# Altium PCB servo_pwr.PcbDoc (part 1 of 2)
Units mm, origin at the board's own origin, x right, y up, seen from the top; angles counter-clockwise.
Board outline 96 x 219 mm, 2 copper layers (Top Layer, Bottom Layer), stack 1.57 mm thick; 132 components, 82 nets, 367 pads, 95 vias.
Unrouted connection lines stored in the file: 2.
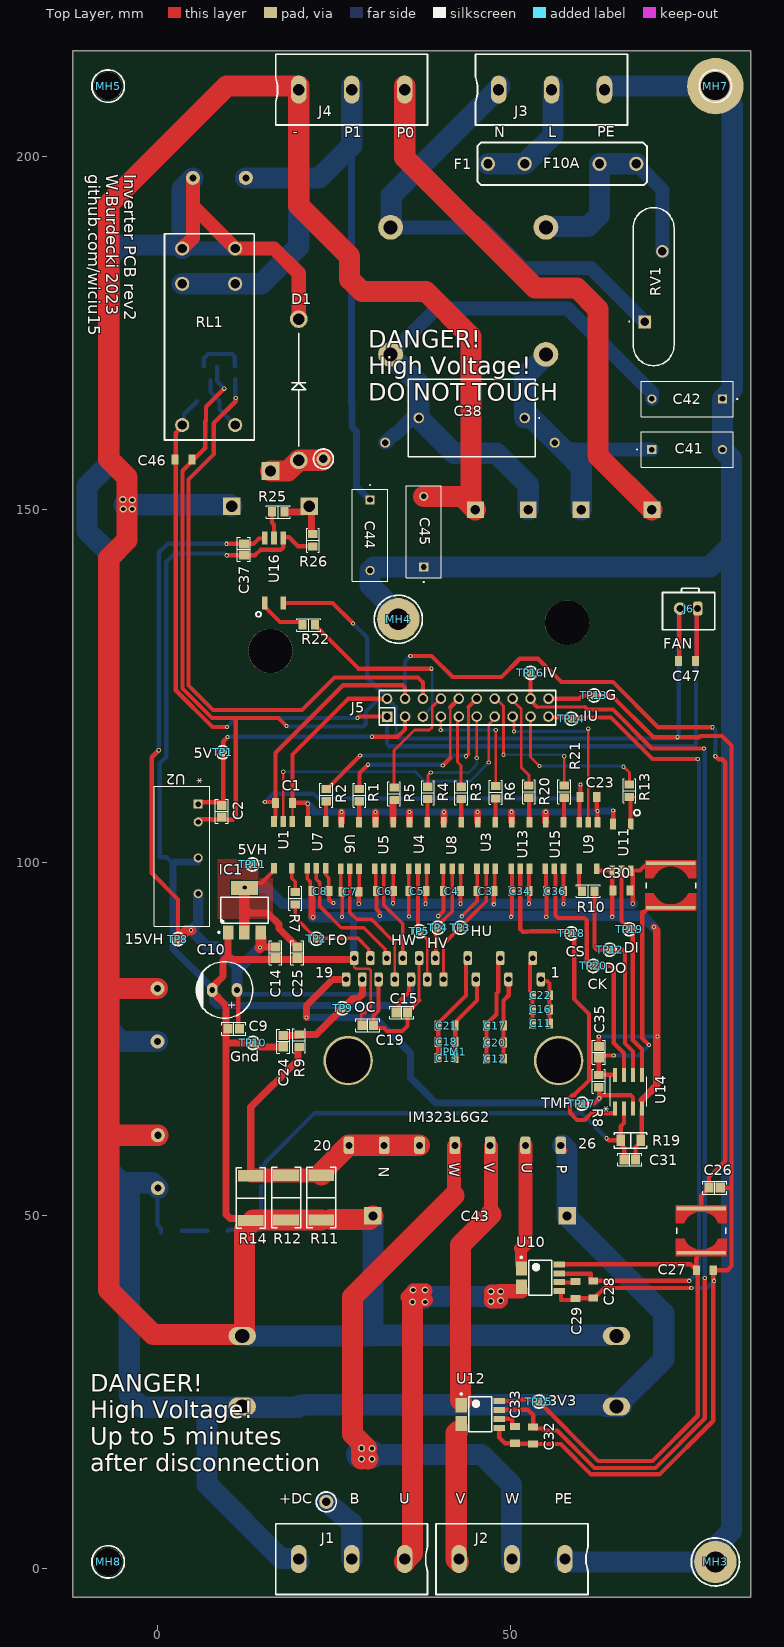
[diagram p0: Top Layer view]
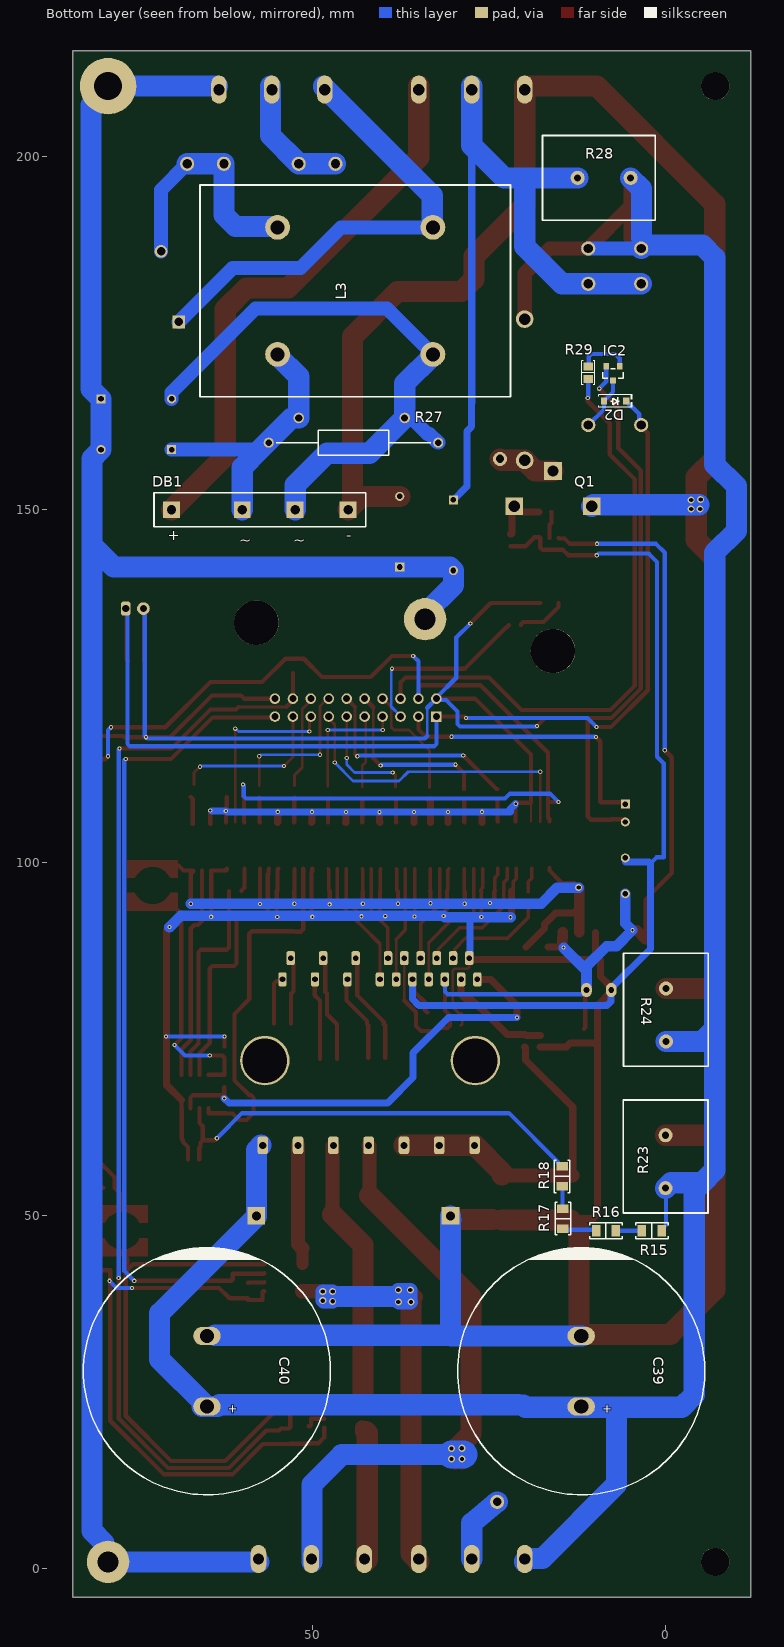
[diagram p1: Bottom Layer view, seen from below]
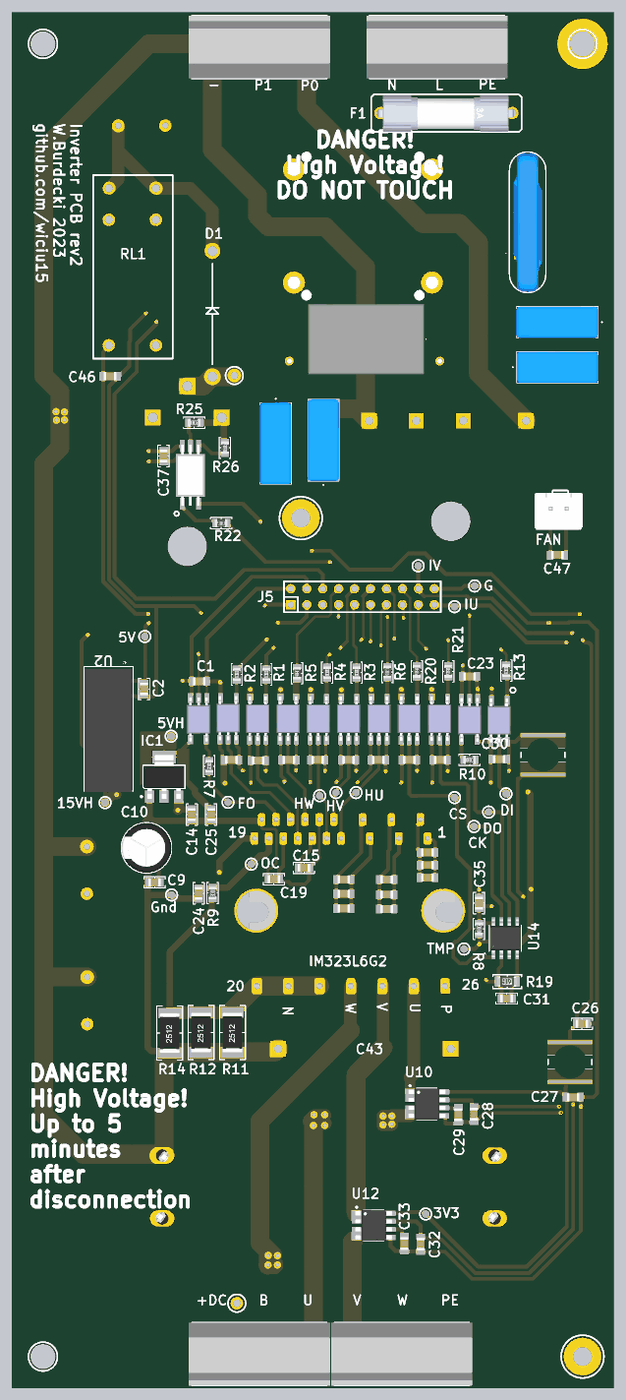
[diagram p3: 3D render of the assembled board from above, using the file's embedded part models]
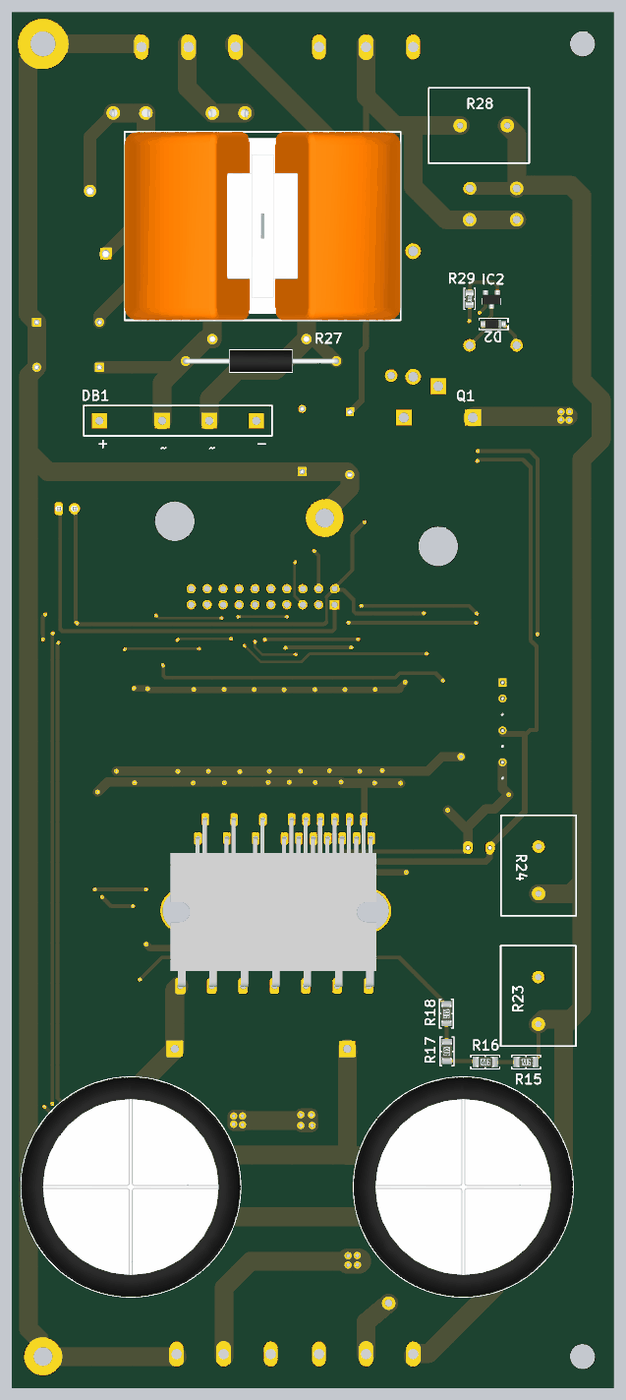
[diagram p4: 3D render of the assembled board from below, using the file's embedded part models]

## Layer stack, top to bottom
Top Solder: solder mask 0.0127, Solder Resist, Dk 3.8
Top Layer: signal copper 0.035
Dielectric: core 1.5, FR-4, Dk 4.5
Bottom Layer: signal copper 0.035
Bottom Solder: solder mask 0.0127, Solder Resist, Dk 3.8

## Board outline
-12,-4 84,-4 84,215 -12,215

## Design rules (kind name [scope] priority, off if disabled: settings)
BoardOutlineClearance [All] p1: gap=0.2 ignorepadtopadclearanceinfootprint=FALSE
Clearance [InNetClass('Cold') vs Not InNetClass('Cold')] p1: gap=3.5 ignorepadtopadclearanceinfootprint=FALSE except(2.5: Arc-Arc Arc-Track Arc-SMDPad Arc-THPad Arc-Via Arc-Fill Arc-Poly Arc-Region Arc-Text Arc-Hole Track-Track Track-SMDPad Track-THPad Track-Via Track-Fill Track-Poly Track-Region Track-Text Track-Hole)
Clearance Clearance_1 [InNetClass('HV') vs Not InNetClass('HV')] p2: gap=2.5 ignorepadtopadclearanceinfootprint=TRUE except(2: Arc-Arc Arc-Track Track-Track)
Clearance Clearance_2 [All] p3: gap=0.18 ignorepadtopadclearanceinfootprint=FALSE
ComponentClearance [All] p1: gap=0.127 collisioncheckmode=3 verticalgap=0.127 showdistances=TRUE
DiffPairsRouting [All] p1: maxlimit=0.254 minlimit=0.127 mostfreqgap=0.127 toplayer_minwidth=0.127 toplayer_maxwidth=25.4 toplayer_prefwidth=0.127 bottomlayer_minwidth=0.127 bottomlayer_maxwidth=25.4 bottomlayer_prefwidth=0.127 maxuncoupledlength=12.7
Height [All] p1: minheight=0 maxheight=1816.048 prefheight=12.7
HoleSize [All] p1: absolutevalues=TRUE maxlimit=6.3 minlimit=0.3 maxpercent=80.000 minpercent=20.000
HoleToHoleClearance [All] p1: gap=0.25 allowstackedmicrovias=FALSE
MinimumAnnularRing [All] p1: minimumring=0.076
MinimumSolderMaskSliver [All] p1: minsoldermaskwidth=0
PlaneClearance [All] p1: clearance=0.127
PlaneConnect PlaneConnectPowerPads [InPadClass('PowerPads')] p1: planeconnectstyle=Direct reliefexpansion=0.508 reliefentries=4 reliefconductorwidth=0.254 reliefairgap=0.254
PlaneConnect [All] p2: pad.planeconnectstyle=Relief pad.reliefexpansion=0.3 pad.reliefentries=4 pad.reliefconductorwidth=0.127 pad.reliefairgap=0.127 via.planeconnectstyle=Direct via.reliefexpansion=0.3 via.reliefentries=4 via.reliefconductorwidth=0.127 via.reliefairgap=0.127
PolygonConnect PolygonConnectPowerPads [All vs (InPadClass('PowerPads'))] p1: connectstyle=Direct reliefconductorwidth=0.254 reliefentries=4 polygonreliefangle="90 Angle" airgapwidth=0.254
PolygonConnect [All] p2: thpad.connectstyle=Relief thpad.reliefconductorwidth=0.127 thpad.reliefentries=4 thpad.polygonreliefangle="90 Angle" thpad.airgapwidth=0.127 smdpad.connectstyle=Relief smdpad.reliefconductorwidth=0.127 smdpad.reliefentries=4 smdpad.polygonreliefangle="90 Angle" smdpad.airgapwidth=0.127 via.connectstyle=Direct via.reliefconductorwidth=0.127 via.reliefentries=4 via.polygonreliefangle="90 Angle" via.airgapwidth=0.127
RoutingVias [All] p1: holewidth=0.3 width=0.6 viastyle="Through Hole" minholewidth=0.3 minwidth=0.6 maxholewidth=0.6 maxwidth=6.6
SilkToSilkClearance [All] p1: silktosilkclearance=0
SilkToSolderMaskClearance [IsPad] p1: minsilkscreentomaskgap=0.127 clearancetoexposedcopper=TRUE
SolderMaskExpansion [All] p1: expansion=0.075 istentingtop=FALSE
Width [All] p1: maxlimit=25.4 minlimit=0.127 preferedwidth=0.127 minimp=50.000000 maximp=50.000000 favimp=50.000000
20 further rules are at their usual default settings.

## Classes and differential pairs
net class HV: +Ug AC-L AC-N B- NetC38_1 NetC38_2 NetIPM1_24 NetIPM1_25 P0 P1 U_phase V_phase W_phase
net class Cold: +3V3 +5 +24 ADC_CLK ADC_CS ADC_MISO ADC_MOSI BRAKE EARTH GND HinU HinV HinW I_U I_V IGBT_flt LinU LinV LinW NetC27_2 NetC29_2 NetC33_2 NetD2_1 NetIC2_1 NetR1_2 NetR2_2 NetR3_2 NetR4_2 NetR5_2 NetR6_2 NetR13_2 NetR20_2 NetR21_2 NetR22_2 Softstart
component class servo_pwr: J1 J2 J3 J4 J5 J6 MH3 MH4 MH5 MH7 MH8
component class igbt_output: C1 C2 C3 C4 C5 C6 C7 C8 C9 C10 C11 C12 C13 C14 C15 C16 C17 C18 C19 C20 C21 C22 C23 C24 C25 C26 C27 C28 C29 C30 C31 C32 C33 C34 C35 C36 IC1 IPM1 R1 R2 R3 R4 R5 R6 R7 R8 R9 R10 R11 R12 R13 R14 R15 R16 R17 R18 R19 R20 R21 TP1 TP2 TP3 TP4 TP5 TP8 TP9 TP10 TP11 TP12 TP13 TP14 TP15 TP16 TP17 TP18 TP19 TP20 U1 U2 U3 U4 U5 U6 U7 U8 U9 U10 U11 U12 U13 U14 U15
component class DClink: C37 C38 C39 C40 C41 C42 C43 C44 C45 D1 D2 DB1 F1 IC2 L3 Q1 R22 R23 R24 R25 R26 R27 R28 R29 RL1 RV1 U16

## Components (designator, comment, footprint, x,y, rotation, side; value= is the part's Value field where it differs from the comment)
C1 "2.2 µF" "0805 wide" 19.1,108.5 r180 top
C2 "22 µF" "CAP 0805_2012" 9.1,107.3 r90 top
C3 "2.2 µF" "0805 wide" 45.25,96 r0 top
C4 "2.2 µF" "0805 wide" 40.5,96 r0 top
C5 "2.2 µF" "0805 wide" 35.6,96 r0 top
C6 "2.2 µF" "0805 wide" 31,96 r0 top
C7 "2.2 µF" "0805 wide" 26.1,95.9 r0 top
C8 "2.2 µF" "0805 wide" 21.85,96 r0 top
C9 "22 µF" "CAP 0805_2012" 10.8,76.5 r0 top
C10 "100 µF" "CAP AL TH D8 L3.5 H12.5" 9.5,82 r180 top locked
C11 "2.2 µF" "0805 wide" 53.1,77.25 r0 top
C12 "2.2 µF" "0805 wide" 46.6,72.25 r0 top
C13 "2.2 µF" "0805 wide" 39.75,72.35 r0 top
C14 "2.2 µF" "CAP 0805_2012" 16.7,87.3 r90 top
C15 "2.2 µF" "CAP 0805_2012" 34.6,78.8 r0 top
C16 "2.2 µF" "0805 wide" 53.1,79.25 r0 top
C17 "2.2 µF" "0805 wide" 46.6,76.95 r0 top
C18 "2.2 µF" "0805 wide" 39.75,74.65 r0 top
C19 "2.2 µF" "CAP 0805_2012" 29.8,77 r0 top
C20 "2.2 µF" "0805 wide" 46.6,74.55 r0 top
C21 "2.2 µF" "0805 wide" 39.75,76.95 r0 top
C22 "2.2 µF" "0805 wide" 53.1,81.25 r0 top
C23 "2.2 µF" "0805 wide" 62.2,109.3 r180 top
C24 "10000 pF" "CAP 0805_2012" 17.8,74.75 r90 top
C25 "2.2 µF" "CAP 0805_2012" 19.8,87.3 r90 top
C26 "22 µF" "CAP 0805_2012" 78.9,54 r180 top
C27 "22 µF" "0805 wide" 78.7,42.3 r180 top
C28 "4700 pF" "0805 wide" 61.7,38.4 r90 top
C29 "0.1 µF" "0805 wide" 59.2,38.3 r90 top
C30 "2.2 µF" "0805 wide" 64.5,96.1 r0 top
C31 "1000 pF" "CAP 0805_2012" 66.9,58 r180 top
C32 "4700 pF" "0805 wide" 53.2,17.7 r90 top
C33 "0.1 µF" "0805 wide" 50.6,17.8 r90 top
C34 "2.2 µF" "0805 wide" 50.2,96 r0 top
C35 "22 µF" "CAP 0805_2012" 62.5,73.2 r270 top
C36 "2.2 µF" "0805 wide" 55.1,96 r0 top
C37 "2.2 µF" "CAP 0805_2012" 12.225,144.375 r90 top
C38 "470n X2 275V" R46KI347050M1K 52,163 r180 top
C39 "470µF" "CAP TH ALUM ELEC D35.00mm S10.00mm H47.00mm" 12,28 r270 bottom locked
C40 "470µF" "CAP TH ALUM ELEC D35.00mm S10.00mm H47.00mm" 65,28 r270 bottom locked
C41 "4n7" B32021_(13_x_5) 70,158.52 r0 top
C42 "4n7" B32021_(13_x_5) 80,165.698 r180 top
C43 "3.3u/600V" C4AQHBU4330P1WJ 30.5,50 r0 top
C44 "4n7" B32021_(13_x_5) 30.1,151.4 r270 top
C45 "4n7" B32021_(13_x_5) 37.7,141.9 r90 top
C46 "Comment" "0805 wide" 2.5,157.1 r0 top
C47 "Comment" "0805 wide" 73.8,128.6 r0 top
D1 "10A6" 10A6 20,157 r90 top
D2 "1N4148W-7-F" SOD-123 7.2,165.4 r180 bottom
DB1 "Component_1" GBJ2506 70,150 r180 bottom locked
F1 "Fuse" FUSE 46.8,199 r0 top
IC1 "LD1117S50TR" "ST SOT-223" 12.3,93.3 r90 top
IC2 "2N7002E-7-F" "DIODES SOT-23-3" 7.5,169.3 r270 bottom
IPM1 "IM323L6G2" IM323L6G2 54.3,83.5 r270 top locked
J1 "DG128-7.5-03P-14" DG128-7.5-03P-14 16.5,1.4 r0 top
J2 "DG128-7.5-03P-14" DG128-7.5-03P-14 39.2,1.4 r0 top
J3 "DG128-7.5-03P-14" DG128-7.5-03P-14 66.8,209.5 r180 top
J4 "DG128-7.5-03P-14" DG128-7.5-03P-14 38.5,209.5 r180 top
J5 "goldpin" "goldpin 2x10" 32.51,120.71 r90 top
J6 "FAN" "JST XH 2pin" 76.5,136 r270 top
L3 "SC-18-25J" SC18-25J 33,190 r0 bottom
MH3 "Mountinghole_M2,5" "Mountinghole M2,5" 79,1 r0 top
MH4 "Mountinghole_M2,5" "Mountinghole M2,5" 34.1,134.5 r0 top
MH5 "Mountinghole_M2,5_nonplated" "Mountinghole M2,5 non plated"#1 -7,210 r0 top
MH7 "Mountinghole_M2,5_nonplated" "Mountinghole M2,5 non plated"#2 79,210 r0 top
MH8 "Mountinghole_M2,5_nonplated" "Mountinghole M2,5 non plated"#1 -7,1 r0 top
Q1 "STGW30NC60KD" STGW30NC60KD 16,150.5 r180 bottom locked
R1 "470 Ohms" "RES 0805_2012" 28.6,109.6 r270 top
R2 "470 Ohms" "RES 0805_2012" 23.9,109.6 r270 top
R3 "470 Ohms" "RES 0805_2012" 43,109.9 r270 top
R4 "470 Ohms" "RES 0805_2012" 38.3,109.9 r270 top
R5 "470 Ohms" "RES 0805_2012" 33.5,109.8 r270 top
R6 "470 Ohms" "RES 0805_2012" 47.9,110 r270 top
R7 "1 kOhms" "RES 0805_2012" 19.5,95 r270 top
R8 "22 kOhms" "RES 0805_2012" 62.5,69.1 r90 top
R9 "47 Ohms" "RES 0805_2012" 20.05,74.8 r270 top
R10 "1 kOhms" "RES 0805_2012" 61,96 r0 top
R11 "150 mOhms" "RES 2512_6432" 23.2,52.6 r90 top
R12 "150 mOhms" "RES 2512_6432" 18.2,52.6 r90 top
R13 "470 Ohms" "RES 0805_2012" 66.825,110.225 r270 top
R14 "150 mOhms" "RES 2512_6432" 13.2,52.525 r90 top
R15 "100 kOhms" "RES 1206_3216" 2,47.9 r180 bottom
R16 "100 kOhms" "RES 1206_3216" 8.5,47.9 r180 bottom
R17 "100 kOhms" "RES 1206_3216" 14.6,49.6 r270 bottom
R18 "100 kOhms" "RES 1206_3216" 14.7,55.6 r270 bottom
R19 "4.7 kOhms" "RES 1206_3216" 67,60.7 r180 top
R20 "470 Ohms" "RES 0805_2012" 52.6,110.1 r270 top
R21 "470 Ohms" "RES 0805_2012" 57.6,110.1 r270 top
R22 "470 Ohms" "RES 0805_2012" 21.4,133.7 r180 top
R23 "PRM05WJP333" prmaawjw470b00 0.05,61.425 r270 bottom
R24 "PRM05WJP333" prmaawjw470b00 0,82.2 r270 bottom
R25 "47 Ohms" "RES 0805_2012" 17.1,149.7 r0 top
R26 "10 kOhms" "RES 0805_2012" 22,145.7 r90 top
R27 "1M" RESAD2400W75L1000D350 32.25,159.5 r0 bottom
R28 "PRMAAWJW470B00" prmaawjw470b00 12.5,197 r180 bottom
R29 "470 Ohms" "RES 0805_2012" 11,169.4 r90 bottom
RL1 "G2R-1A-E" G2R-1A-E 11,162 r90 top
RV1 "SIOV-S20K275" B72220Q0271K101 69,176.6 r90 top
TP1 "5V" Testpoint1,2mm 9.225,115.65 r0 top
TP2 "FO" Testpoint1,2mm 22.5,89.25 r0 top
TP3 "HU" Testpoint1,2mm 42.9,90.8 r0 top
TP4 "HV" Testpoint1,2mm 39.7,90.8 r0 top
TP5 "HW" Testpoint1,2mm 37.1,90.3 r0 top
TP8 "15VH" Testpoint1,2mm 2.9,89.2 r0 top
TP9 "OC" Testpoint1,2mm 26.2,79.4 r90 top
TP10 "Gnd" Testpoint1,2mm 13.5,74.5 r90 top
TP11 "5VH" Testpoint1,2mm 13.425,99.775 r90 top
TP12 "DO" Testpoint1,2mm 64.037,87.7 r90 top
TP13 "G" Testpoint1,2mm 61.8,123.7 r90 top
TP14 "IU" Testpoint1,2mm 58.6,120.4 r90 top
TP15 "3V3" Testpoint1,2mm 54,23.7 r90 top
TP16 "IV" Testpoint1,2mm 52.8,126.9 r90 top
TP17 "TMP" Testpoint1,2mm 60.1,65.9 r90 top
TP18 "CS" Testpoint1,2mm 58.6,90 r90 top
TP19 "DI" Testpoint1,2mm 66.8,90.6 r90 top
TP20 "CK" Testpoint1,2mm 61.7,85.4 r90 top
U1 "TLP2345" TLP2345 16.5,99.25 r90 top
U2 "TBA 2-0513" "TBA 2_SINGLE_TRP" 5.75,108.315 r270 top
U3 "TLP2345" TLP2345 47.844,105.75 r270 top
U4 "TLP2345" TLP2345 38.19,105.75 r270 top
U5 "TLP2345" TLP2345 33.363,105.75 r270 top
U6 "TLP2345" TLP2345 28.535,105.75 r270 top
U7 "TLP2345" TLP2345 23.8,105.85 r270 top
U8 "TLP2345" TLP2345 43.017,105.75 r270 top
U9 "TLP2345" TLP2345 59.7,99.15 r90 top
U10 "LEM GO10SME/SP3" TSOP127P600X160-8N 54.2,41.243 r0 top
U11 "TLP2345" TLP2345 67,105.5 r270 top
U12 "LEM GO10SME/SP3" TSOP127P600X160-8N 45.7,21.9 r0 top
U13 "TLP2345" TLP2345 52.672,105.75 r270 top
U14 "MCP3002-I/SN" SOIC8-N_MC_MCH 66.7,67.6 r90 top
U15 "TLP2345" TLP2345 57.5,105.75 r270 top
U16 "TLP701" TLP701 15.2,136.8 r90 top

## Footprints (in the part's own frame and the unit in brackets; to place one, negate y for a bottom-side part, rotate by r counter-clockwise, add the part's x,y. Pads: shape width x height; smd on the part's side, far side on the other; paste and mask are expansions set on the pad)
10A6 [mm]
  round 2.5 hole 1.6: A(0,0) K(20,0)
  silkscreen extent 2,-1 18,1
"0805 wide" [mm]
  rect 1x1.4 smd: 1(0,0) 2(2.4,0)
  body extent 0.2,-0.62 2.2,0.65, height 1.34
B32021_(13_x_5) [mm]
  rect 1.3x1.3 hole 0.8: 1(0,0)
  round 1.3 hole 0.8: 2(10,0)
  silkscreen extent -2.15,-2.5 11.5,2.5, body extent -1.49,-2.5 11.51,2.5, height 10.79
B72220Q0271K101 [mm]
  rect 1.8x1.8 hole 1.2: 1(0,0)
  round 1.8 hole 1.2: 2(10,-2.5)
  silkscreen extent -6.2,-4.15 16.2,2.25, body extent -6.05,-3.57 15.95,1.02, height 26
C4AQHBU4330P1WJ [mm]
  rect 2.5x2.5 hole 1.3: 1(0,0) 2(27.5,0)
  body extent -2,-5.5 29.5,5.5, height 20
"CAP 0805_2012" [mm] "Chip Capacitor, 2-Leads, Body 2.00x1.20mm, IPC Medium Density"
  rect 1.3x1.4 smd: 1(-0.8,0) 2(0.8,0)
  silkscreen extent -1.7,-0.9 1.7,0.9, body extent -1,-0.64 1,0.64, height 1.26
"CAP AL TH D8 L3.5 H12.5" [mm] "8MM Diameter, 3.5MM Lead Spacing Aluminium Capacitor"
  oval 1.5x2 hole 0.8: 1(-1.75,0) 2(1.75,0)
  silkscreen extent -4,-4 4,4, body extent -4,-4 4,4, height 11.5
"CAP TH ALUM ELEC D35.00mm S10.00mm H47.00mm" [mm] "35mm Diameter 10mm Lead Spacing Aluminum Electrolytic Capacitors Radial, Can , Snap-In"
  oval 2.6x3.9 hole 2: 1(5,0) 2(-5,0)
  silkscreen extent -17.5,-17.5 17.5,17.5, body extent -17.51,-17.5 17.5,17.5, height 47
DG128-7.5-03P-14 [mm]
  oval 2.2x4 hole 1.6: 1(3.5,0) 2(11,0) 3(18.5,0)
  silkscreen extent 0.25,-5 21.75,5, body extent -0.25,-5.02 22.25,5, height 13.96
"DIODES SOT-23-3" [mm] "SOT23, 3-Leads, Body 2.90x2.40mm, Pitch 0.95mm, IPC Medium Density"
  rect 0.9x0.8 smd: 1(-1,0.95) 2(-1,-0.95) 3(1,0)
  silkscreen extent -0.7,-1.45 0.7,1.45, body extent -1.41,-1.45 1.41,1.45, height 1.5
FUSE [mm]
  round 2 hole 1.3: 1(0,0) 1(5.2,0) 2(15.8,0) 2(21,0)
  silkscreen extent -1.5,-3 22.5,3, body extent -0.4,-3 21.2,2.8, height 8.35
G2R-1A-E [mm]
  round 2 hole 1.3: 1(0,0) 2(0,7.5) 3(20,0) 3(20,7.5) 4(25,0) 4(25,7.5)
  silkscreen extent -2.1,-2.7 27.1,10, body extent -2.1,-2.7 27.1,10, height 26
GBJ2506 [mm]
  rect 2.4x2.4 hole 1.3: 1(0,0) 2(10,0) 3(17.5,0) 4(25,0)
  round 6.3 hole 6.3 unplated: ""(12,-16)
  silkscreen extent -2.5,-2.4 27.5,2.4, body extent -3,-25 28,-3.7, height 9.5
"goldpin 2x10" [mm]
  rect 1.5x1.5 hole 1: 1(0,0)
  round 1.5 hole 1: 2(0,-2.54) 3(0,-5.08) 4(0,-7.62) 5(0,-10.16) 6(0,-12.7) 7(0,-15.24) 8(0,-17.78) 9(0,-20.32) 10(0,-22.86) 11(2.54,-22.86) 12(2.54,-20.32) 13(2.54,-17.78) 14(2.54,-15.24) 15(2.54,-12.7) 16(2.54,-10.16) 17(2.54,-7.62) 18(2.54,-5.08) 19(2.54,-2.54) 20(2.54,0)
  silkscreen extent -1.2,-23.9 3.7,1.1
IM323L6G2 [mm]
  rrect50% 2x1.2 hole 0.8: 1(0,0) 2(-3,-1.15) 3(0,-4.6) 4(-3,-5.75) 5(0,-9.2) 6(-3,-10.35) 7(0,-13.8) 8(-3,-14.95) 9(0,-16.1) 10(-3,-17.25) 11(0,-18.4) 12(-3,-19.55) 13(0,-20.7) 14(-3,-21.85) 15(0,-23) 16(-3,-24.15) 17(0,-25.3) 18(-3,-26.45) 19(0,-27.6)
  rrect50% 2.5x1.5 hole 1: 20(23.5,-27.2) 21(23.5,-22.2) 22(23.5,-17.2) 23(23.5,-12.2) 24(23.5,-7.2) 25(23.5,-2.2) 26(23.5,2.8)
  round 7 hole 6.3 unplated: ""(11.5,2.5) ""(11.5,-27.3)
  body extent -3.17,-28.43 23.63,4.37, height 3.68
"JST XH 2pin" [mm]
  rrect50% 2x1.3 hole 1: 1(0,0)
  round 1.8 hole 1: 2(0,-2.5)
  silkscreen extent -2.9,-5 3,2.4, body extent -2.49,-4.91 3.35,2.31, height 7.21
"Mountinghole M2,5" [mm]
  round 6 hole 3: 1(0,0)
  silkscreen extent -3.4,-3.4 3.4,3.4
"Mountinghole M2,5 non plated"#1 [mm]
  round 4 hole 4 unplated: 1(0,0)
  silkscreen extent -2.3,-2.3 2.3,2.3
"Mountinghole M2,5 non plated"#2 [mm]
  round 8 hole 4: 1(0,0)
  silkscreen extent -2.3,-2.3 2.3,2.3
prmaawjw470b00 [mm]
  round 2 hole 1: 1(0,0) 2(7.5,0)
  silkscreen extent -5,-6 11,6, body extent -5,-6 11,6, height 35
R46KI347050M1K [mm]
  round 1.5 hole 1: 1(0,0) 2(15,0)
  silkscreen extent -2.1,-5.5 16.5,5.5, body extent -1.75,-5.61 16.75,5.6, height 19.01
"RES 0805_2012" [mm] "Chip Resistor, 2-Leads, Body 2.00x1.25mm, IPC Medium Density"
  rect 1.15x1.35 smd: 1(-0.875,0) 2(0.875,0)
  silkscreen extent -1.7,-0.9 1.7,0.9, body extent -1,-0.62 1,0.63, height 0.6
"RES 1206_3216" [mm] "Chip Resistor, 2-Leads, Body 3.13x1.55mm, IPC Medium Density"
  rect 1.2x1.65 smd: 1(-1.4,0) 2(1.4,0)
  silkscreen extent -2.3,-1.1 2.3,1.1, body extent -1.6,-0.8 1.6,0.8, height 0.6
"RES 2512_6432" [mm] "Chip Resistor, 2-Leads, Body 6.30x3.15mm, IPC Medium Density"
  rect 1.6x3.65 smd: 1(-3.175,0) 2(3.175,0)
  silkscreen extent -4.3,-2.05 4.3,2.05, body extent -3.15,-1.58 3.15,1.57, height 0.7
RESAD2400W75L1000D350 [mm]
  round 1.425 hole 0.95: 1(0,0) 2(24,0)
  silkscreen extent 1.06,-1.75 22.94,1.75, body extent -0.37,-1.75 24.38,1.75, height 3.5
SC18-25J [mm]
  round 3.5 hole 2: 1(0,0) 2(0,18) 3(22,0) 4(22,18)
  silkscreen extent -11,-6 33,24, body extent -11,-6 33,24, height 43.39
SOD-123 [mm] "SOD, 2-Leads, Body 1.55x3.70mm, IPC Medium Density"
  rect 0.9x0.95 smd: 1(-1.575,0) 2(1.575,0)
  silkscreen extent -2.3,-0.92 2.41,0.92, body extent -1.86,-0.77 1.86,0.77, height 1.35
SOIC8-N_MC_MCH [mm]
  rect 1.97x0.558 smd paste+0 mask+0: 1(-2.362,1.905) 2(-2.362,0.635) 3(-2.362,-0.635) 4(-2.362,-1.905) 5(2.362,-1.905) 6(2.362,-0.635) 7(2.362,0.635) 8(2.362,1.905)
  silkscreen extent -2.08,-2.58 2.08,2.58, body extent -3,-2.45 3,2.45, height 1.76
"ST SOT-223" [mm] "SOT223, 4-Leads, Body 6.50x7.00mm (avg), Pitch 2.30mm, IPC Medium Density"
  rect 2x1.5 smd: 1(-3.15,2.3) 2(-3.15,0) 3(-3.15,-2.3)
  rect 2x3.8 smd: 4(3.15,0)
  silkscreen extent -3.27,-3.35 1.85,3.72, body extent -3.52,-3.25 3.5,3.25, height 1.8
STGW30NC60KD [mm]
  rect 2.5x2.5 hole 1.6: 1(-5.5,0) 2(0,5) 3(5.5,0)
  round 6.3 hole 6.3 unplated: ""(0,-20.5)
  body extent -8,-24.5 8,-4, height 9.5
"TBA 2_SINGLE_TRP" [mil]
  rect 50x50 hole 30 mask+0: 1(0,0)
  round 50 hole 30 mask+0: 2(100,0) 4(300,0) 6(500,0)
  silkscreen extent -100,-245 680,64, body extent -85,-240 685,59, height 402
Testpoint1,2mm [mm]
  round 1.2 smd: 1(0,0)
  silkscreen extent -0.92,-0.92 0.92,0.92
TLP701 [mm]
  rect 1.9x0.8 smd: 1(0,0) 3(0,-2.6) 4(9.2,-2.6) 5(9.2,-1.3) 6(9.2,0)
  silkscreen extent -1.96,0.54 -1.24,1.26, body extent -0.35,-3.59 9.35,0.99, height 4
TLP2345 [mm]
  rect 1.5x0.8 smd: 1(0,0) 3(0,-2.5) 4(6.6,-2.6) 5(6.6,-1.3) 6(6.6,0)
  body extent -0.3,-3.15 6.7,0.55, height 2.2
TSOP127P600X160-8N [mm] "TSOP, 8-Leads, Body 4,90x3,95mm, Pitch 1,27mm, IPC Medium Density"
  rect 1.6x0.85 smd: 1(-2.667,1.905) 4(-2.667,-1.905) 5(2.7,-1.905) 6(2.7,-0.635) 7(2.7,0.635) 8(2.7,1.905)
  rect 1.6x1.2 smd: 2(-2.667,0.889)
  rect 1.6x1.25 smd: 3(-2.667,-0.889)
  silkscreen extent -2.82,-2.5 1.6,3, body extent -2.95,-2.5 2.95,2.5, height 1.6

## Part data
C1 C3 C4 C5 C6 C7 C8 C11 C12 C13 C14 C15 C16 C17 C18 C19 C20 C21 C22 C23 C25 C30 C34 C36 C37: library part C2012X7R1V225K125AB, "CAP CER 2.2UF 35V X7R 0805", Device Package="0805 (2012 Metric)", manufacturer="TDK Corporation", Operating Temperature="-55°C ~ 125°C", Supplier Part Number 1=445-7551-1-ND, Temperature Coefficient=X7R, Tolerance=±10%, Voltage - Rated=35V, Applications="General Purpose", Capacitance="2.2 µF", componentlink1description=Datasheet, componentlink1url=https://product.tdk.com/info/en/catalog/datasheets/mlcc_commercial_general_en.pdf?ref_disty=digikey, componentlink2description="DigiKey Link", componentlink2url=https://www.digikey.com/en/products/detail/tdk-corporation/C2012X7R1V225K125AB/2732986, Features="Low ESL", lastupdated="03.01.2023 20:10:54", Lifecycle Status=Active, Minimum Order=1, Mounting Type="Surface Mount, MLCC", Package / Case="0805 (2012 Metric)", packaging=TapeAndReel, Part Number=C2012X7R1V225K125AB, Part Status=Active, partid=3412, price=0.12, series=C, Size / Dimension="0.079\" L x 0.049\" W (2.00mm x 1.25mm)", Supplier 1=DigiKey, Thickness (Max)="0.057\" (1.45mm)"
C2 C9 C26 C27 C35: library part CL21A226KOQNNNG, "CAP CER 22UF 16V X5R 0805", Device Package="0805 (2012 Metric)", manufacturer="Samsung Electro-Mechanics", Operating Temperature="-55°C ~ 85°C", Supplier Part Number 1=1276-7092-1-ND, Temperature Coefficient=X5R, Tolerance=±10%, Voltage - Rated=16V, Applications="General Purpose", Capacitance="22 µF", componentlink1description=Datasheet, componentlink1url=//media.digikey.com/pdf/Data%20Sheets/Samsung%20PDFs/CL21A226KOQNNNG_Spec.pdf, componentlink2description="DigiKey Link", componentlink2url=https://www.digikey.com/en/products/detail/samsung-electro-mechanics/CL21A226KOQNNNG/3894433, lastupdated="03.01.2023 20:10:55", Lifecycle Status=Active, Minimum Order=1, Mounting Type="Surface Mount, MLCC", Package / Case="0805 (2012 Metric)", packaging=TapeAndReel, Part Number=CL21A226KOQNNNG, Part Status=Active, partid=3000, price=0.06, series=CL, Size / Dimension="0.079\" L x 0.049\" W (2.00mm x 1.25mm)", Supplier 1=DigiKey, Thickness (Max)="0.055\" (1.40mm)"
C10: library part EEU-TA1E101, "CAP ALUM 100UF 20% 25V RADIAL", Device Package="Radial, Can", Lifetime @ Temp.="2000 Hrs @ 125°C", manufacturer="Panasonic Electronic Components", Operating Temperature="-40°C ~ 125°C", Ripple Current @ High Frequency="500 mA @ 100 kHz", Ripple Current @ Low Frequency="325 mA @ 120 Hz", Supplier Part Number 1=P19501-ND, Tolerance=±20%, Voltage - Rated="25 V", Applications="General Purpose", Capacitance="100 µF", componentlink1description=Datasheet, componentlink1url=http://industrial.panasonic.com/www-cgi/jvcr13pz.cgi?E+PZ+3+ABA0028+EEUTA1E101+8+WW, componentlink2description="DigiKey Link", componentlink2url=https://www.digikey.com/en/products/detail/panasonic-electronic-components/EEU-TA1E101/2689893, Height - Seated (Max)="0.492\" (12.50mm)", Impedance="130 mOhms", lastupdated="02.01.2023 21:00:54", Lead Spacing="0.138\" (3.50mm)", Lifecycle Status=Active, Minimum Order=1, Mounting Type="Through Hole", Package / Case="Radial, Can", packaging=Bulk, Part Number=EEU-TA1E101, Part Status=Active, partid=7202, Polarization=Polar, price=0.31, series=TA, Size / Dimension="0.315\" Dia (8.00mm)", Supplier 1=DigiKey
C24: library part C0805C103K5RECAUTO, "CAP CER 0805 10NF 50V X7R 10%", Device Package="0805 (2012 Metric)", manufacturer=KEMET, Operating Temperature="-55°C ~ 125°C", Ratings=AEC-Q200, Supplier Part Number 1=399-17885-1-ND, Temperature Coefficient=X7R, Tolerance=±10%, Voltage - Rated=50V, Applications="Automotive, ESD Protection", Capacitance="10000 pF", componentlink1description=Datasheet, componentlink1url=https://api.kemet.com/component-edge/download/datasheet/C0805C103K5RECAUTO.pdf, componentlink2description="DigiKey Link", componentlink2url=https://www.digikey.com/en/products/detail/kemet/C0805C103K5RECAUTO/8640479, lastupdated="03.01.2023 20:10:42", Lifecycle Status=Active, Minimum Order=1, Mounting Type="Surface Mount, MLCC", Package / Case="0805 (2012 Metric)", packaging=TapeAndReel, Part Number=C0805C103K5RECAUTO, Part Status=Active, partid=8498, price=0.04, series="ESD SMD Auto X7R", Size / Dimension="0.079\" L x 0.049\" W (2.00mm x 1.25mm)", Supplier 1=DigiKey, Thickness (Max)="0.035\" (0.88mm)"
C28 C32: library part C0805C472K5RECAUTO, "CAP CER 0805 4.7NF 50V X7R 10%", Device Package="0805 (2012 Metric)", manufacturer=KEMET, Operating Temperature="-55°C ~ 125°C", Ratings=AEC-Q200, Supplier Part Number 1=399-17884-1-ND, Temperature Coefficient=X7R, Tolerance=±10%, Voltage - Rated=50V, Applications="Automotive, ESD Protection", Capacitance="4700 pF", componentlink1description=Datasheet, componentlink1url=https://api.kemet.com/component-edge/download/datasheet/C0805C472K5RECAUTO.pdf, componentlink2description="DigiKey Link", componentlink2url=https://www.digikey.com/en/products/detail/kemet/C0805C472K5RECAUTO/8640478, lastupdated="03.01.2023 20:10:48", Lifecycle Status=Active, Minimum Order=1, Mounting Type="Surface Mount, MLCC", Package / Case="0805 (2012 Metric)", packaging=TapeAndReel, Part Number=C0805C472K5RECAUTO, Part Status=Active, partid=5836, price=0.04, series="ESD SMD Auto X7R", Size / Dimension="0.079\" L x 0.049\" W (2.00mm x 1.25mm)", Supplier 1=DigiKey, Thickness (Max)="0.035\" (0.88mm)"
C29 C33: library part CC0805MRX7R9BB104, "CAP CER 0.1UF 50V X7R 0805", Device Package="0805 (2012 Metric)", manufacturer=Yageo, Operating Temperature="-55°C ~ 125°C", Supplier Part Number 1=311-4351-1-ND, Temperature Coefficient=X7R, Tolerance=±20%, Voltage - Rated=50V, Applications="General Purpose", Capacitance="0.1 µF", componentlink1description=Datasheet, componentlink1url=https://www.yageo.com/upload/media/product/productsearch/datasheet/mlcc/UPY-GPHC_X7R_6.3V-to-50V_18.pdf, componentlink2description="DigiKey Link", componentlink2url=https://www.digikey.com/en/products/detail/yageo/CC0805MRX7R9BB104/5884281, lastupdated="03.01.2023 20:10:56", Lifecycle Status=Active, Minimum Order=1, Mounting Type="Surface Mount, MLCC", Package / Case="0805 (2012 Metric)", packaging=TapeAndReel, Part Number=CC0805MRX7R9BB104, Part Status=Active, partid=2475, price=0.02, series=CC, Size / Dimension="0.079\" L x 0.049\" W (2.00mm x 1.25mm)", Supplier 1=DigiKey, Thickness (Max)="0.037\" (0.95mm)"
C31: library part C0805X102J5HACAUTO, "CAP CER 0805 1NF 50V ULTRA STABL", Device Package="0805 (2012 Metric)", manufacturer=KEMET, Operating Temperature="-55°C ~ 150°C", Ratings=AEC-Q200, Supplier Part Number 1=399-16876-1-ND, Temperature Coefficient=X8R, Tolerance=±5%, Voltage - Rated=50V, Applications="Automotive, Boardflex Sensitive", Capacitance="1000 pF", componentlink1description=Datasheet, componentlink1url=https://api.kemet.com/component-edge/download/datasheet/C0805X102J5HACAUTO.pdf, componentlink2description="DigiKey Link", componentlink2url=https://www.digikey.com/en/products/detail/kemet/C0805X102J5HACAUTO/8324462, Features="Low ESL, Soft Termination, High Temperature", lastupdated="03.01.2023 20:10:49", Lifecycle Status=Active, Minimum Order=1, Mounting Type="Surface Mount, MLCC", Package / Case="0805 (2012 Metric)", packaging=TapeAndReel, Part Number=C0805X102J5HACAUTO, Part Status=Active, partid=5533, price=0.03, series="SMD Auto X8R HT150C Flex", Size / Dimension="0.079\" L x 0.049\" W (2.00mm x 1.25mm)", Supplier 1=DigiKey, Thickness (Max)="0.039\" (0.98mm)"
C38: library part R46KI347050M1K, "KEMET R46KI347050M1K", Manufacturer_Name=KEMET, Mouser Part Number=80-R46KI347050M1K, Arrow Part Number=R46KI347050M1K, Arrow Price/Stock=https://www.arrow.com/en/products/r46ki347050m1k/kemet-corporation, Datasheet Link=https://content.kemet.com/datasheets/KEM_F3093_R46_X2_275_110C.pdf, Height=19.1mm, Manufacturer_Part_Number=R46KI347050M1K, Mouser Price/Stock=https://www.mouser.co.uk/ProductDetail/KEMET/R46KI347050M1K?qs=D0iH%252BVFiYPOUls74bzoCnw%3D%3D
C39 C40: library part 450HXG470MEFCSN35X45, "CAP ALUM 470UF 20% 450V SNAP", Device Package="Radial, Can - Snap-In", Lifetime @ Temp.="3000 Hrs @ 105°C", manufacturer=Rubycon, Operating Temperature="-25°C ~ 105°C", Ripple Current @ High Frequency="4.088A @ 10kHz", Ripple Current @ Low Frequency="2.92A @ 120Hz", Supplier Part Number 1=1189-1975-ND, Tolerance=±20%, Voltage - Rated=450V, Applications="General Purpose", Capacitance=470µF, componentlink1description=Datasheet, componentlink1url=http://www.rubycon.co.jp/en/catalog/e_pdfs/aluminum/e_HXG.pdf, componentlink2description="DigiKey Link", componentlink2url=http://digikey.com/product-detail/en/rubycon/450HXG470MEFCSN35X45/1189-1975-ND/3986874, Height - Seated (Max)="1.850\" (47.00mm)", lastupdated="29.09.2020 01:08:39", Lead Spacing="0.394\" (10.00mm)", Lifecycle Status=Active, Minimum Order=1, Mounting Type="Through Hole", Package / Case="Radial, Can - Snap-In", packaging=Bulk, Part Number=450HXG470MEFCSN35X45, Part Status=Active, partid=26666, Polarization=Polar, price=8.55, series=HXG, Size / Dimension="1.378\" Dia (35.00mm)", Supplier 1=DigiKey
C41 C42 C44 C45: library part B32021A3472K289, "B32021A3472", Manufacturer_Name=TDK, Mouser Part Number=871-B32021A3472K289, Arrow Part Number=B32021A3472K289, Arrow Price/Stock=https://www.arrow.com/en/products/b32021a3472k289/epcos-tdk, Datasheet Link=https://product.tdk.com/system/files/dam/doc/product/capacitor/film/emi/data_sheet/20/20/db/fc_2009/y2_b32021_026.pdf, Manufacturer_Part_Number=B32021A3472K289, Mouser Price/Stock=https://www.mouser.co.uk/ProductDetail/EPCOS-TDK/B32021A3472K289?qs=FNSAlmj86E3UPc1%2F593FMg%3D%3D
D2: "DIODE GEN PURP 100V 300MA SOD123", Capacitance @ Vr, F="2pF @ 0V, 1MHz", Current - Average Rectified (Io)="300mA (DC)", Current - Reverse Leakage @ Vr="1 µA @ 100 V", manufacturer="Diodes Incorporated", Operating Temperature - Junction="-55°C ~ 150°C", Package / Case=SOD-123, Supplier Part Number 1=1N4148W-FDICT-ND, Voltage - DC Reverse (Vr) (Max)="100 V", Voltage - Forward (Vf) (Max) @ If="1.25 V @ 150 mA", componentlink1description=Datasheet, componentlink1url=https://www.diodes.com/assets/Datasheets/ds30086.pdf, componentlink2description="DigiKey Link", componentlink2url=https://www.digikey.com/en/products/detail/diodes-incorporated/1N4148W-7-F/814371, Diode Type=Standard, lastupdated="02.01.2023 20:53:45", Lifecycle Status=Active, Minimum Order=1, Mounting Type="Surface Mount", packaging=TapeAndReel, Part Number=1N4148W-7-F, Part Status=Active, partid=1002, price=0.02, Reverse Recovery Time (trr)="4 ns", series=-, Speed="Small Signal =< 200mA (Io), Any Speed", Supplier 1=DigiKey, Supplier Device Package=SOD-123
F1: "Fuse holder 04450001N"
IC1: "IC REG LINEAR 5V 800MA SOT223", Current - Output=800mA, Current - Quiescent (Iq)="10 mA", manufacturer=STMicroelectronics, Operating Temperature="0°C ~ 125°C", Package / Case="TO-261-4, TO-261AA", Supplier Device Package=SOT-223, Supplier Part Number 1=497-6447-1-ND, Voltage - Input (Max)=15V, Voltage - Output (Min/Fixed)=5V, Voltage Dropout (Max)="1.2V @ 800mA", componentlink1description=Datasheet, componentlink1url=http://www.st.com/content/ccc/resource/technical/document/datasheet/99/3b/7d/91/91/51/4b/be/CD00000544.pdf/files/CD00000544.pdf/jcr:content/translations/en.CD00000544.pdf, componentlink2description="DigiKey Link", componentlink2url=https://www.digikey.com/en/products/detail/stmicroelectronics/LD1117S50TR/1038360, lastupdated="02.01.2023 21:04:19", Lifecycle Status=Active, Minimum Order=1, Mounting Type="Surface Mount", Number of Regulators=1, Output Configuration=Positive, Output Type=Fixed, packaging=TapeAndReel, Part Number=LD1117S50TR, Part Status=Active, price=0.25, Protection Features="Over Current, Over Temperature", PSRR="75dB (120Hz)", series=-, Supplier 1=DigiKey
IC2: "MOSFET N-CH 60V 0.25A SOT23-3", Current - Continuous Drain (Id) @ 25°C="250mA (Ta)", Drain to Source Voltage (Vdss)=60V, Drive Voltage (Max Rds On,  Min Rds On)="4.5V, 10V", Input Capacitance (Ciss) (Max) @ Vds="50pF @ 25V", manufacturer="Diodes Incorporated", Operating Temperature="-55°C ~ 150°C (TJ)", Package / Case="TO-236-3, SC-59, SOT-23-3", Power Dissipation (Max)="370mW (Ta)", Supplier Device Package=SOT-23-3, Supplier Part Number 1=2N7002E-FDICT-ND, componentlink1description=Datasheet, componentlink1url=https://www.diodes.com/assets/Datasheets/ds30376.pdf, componentlink2description="DigiKey Link", componentlink2url=http://digikey.com/product-detail/en/diodes-incorporated/2N7002E-7-F/2N7002E-FDICT-ND/3877406, FET Type=N-Channel, Gate Charge (Qg) (Max) @ Vgs="0.22nC @ 4.5V", lastupdated="02.01.2023 21:04:52", Lifecycle Status=Active, Minimum Order=1, Mounting Type="Surface Mount", packaging=TapeAndReel, Part Number=2N7002E-7-F, Part Status=Active, price=0.05, Rds On (Max) @ Id, Vgs="3Ohm @ 250mA, 10V", series=-, Supplier 1=DigiKey, Technology="MOSFET (Metal Oxide)", Vgs (Max)=±20V, Vgs(th) (Max) @ Id="2.5V @ 250µA"
J6: library part "JST 2pin"
L3: "https://www.tme.eu/pl/details/sc-18-25j/dlawiki-pierscieniowe/kemet/"
R1 R2 R3 R4 R5 R6 R13 R20 R21 R22 R29: library part ERJ-PB6B4700V, "RES SMD 470 OHM 0.1% 1/4W 0805", Device Package="0805 (2012 Metric)", manufacturer="Panasonic Electronic Components", Operating Temperature="-55°C ~ 155°C", Power (Watts)="0.25W, 1/4W", Ratings=AEC-Q200, Supplier Device Package=0805, Supplier Part Number 1=P20556CT-ND, Temperature Coefficient=±50ppm/°C, Tolerance=±0.1%, componentlink1description=Datasheet, componentlink1url=https://industrial.panasonic.com/cdbs/www-data/pdf/RDM0000/AOA0000C328.pdf, componentlink2description="DigiKey Link", componentlink2url=https://www.digikey.com/en/products/detail/panasonic-electronic-components/ERJ-PB6B4700V/6213339, Composition="Thick Film", Features="Automotive AEC-Q200, Pulse Withstanding", Height - Seated (Max)="0.028\" (0.70mm)", lastupdated="02.01.2023 20:44:49", Lifecycle Status=Active, Minimum Order=1, Number of Terminations=2, Package / Case="0805 (2012 Metric)", packaging=TapeAndReel, Part Number=ERJ-PB6B4700V, Part Status=Active, partid=28402, price=0.04, Resistance="470 Ohms", series=ERJ-PB6, Size / Dimension="0.079\" L x 0.049\" W (2.00mm x 1.25mm)", Supplier 1=DigiKey
R7 R10: library part RNCS0805BKE1K00, "RES 1K OHM 0.1% 1/10W 0805", Device Package="0805 (2012 Metric)", manufacturer="Stackpole Electronics Inc", Operating Temperature="-55°C ~ 155°C", Power (Watts)="0.1W, 1/10W", Ratings=AEC-Q200, Supplier Device Package=0805, Supplier Part Number 1=RNCS0805BKE1K00CT-ND, Temperature Coefficient=±25ppm/°C, Tolerance=±0.1%, componentlink1description=Datasheet, componentlink1url=https://www.seielect.com/catalog/sei-rncs_rnch.pdf, componentlink2description="DigiKey Link", componentlink2url=https://www.digikey.com/en/products/detail/stackpole-electronics-inc/RNCS0805BKE1K00/1800073, Composition="Thin Film", Features="Anti-Corrosive, Automotive AEC-Q200, Moisture Resistant", Height - Seated (Max)="0.026\" (0.65mm)", lastupdated="02.01.2023 20:44:52", Lifecycle Status=Active, Minimum Order=1, Number of Terminations=2, Package / Case="0805 (2012 Metric)", packaging=TapeAndReel, Part Number=RNCS0805BKE1K00, Part Status=Active, partid=27715, price=0.09, Resistance="1 kOhms", series=RNCS, Size / Dimension="0.079\" L x 0.049\" W (2.00mm x 1.25mm)", Supplier 1=DigiKey
R8: library part CRGCQ0805J22K, "RES 22K OHM 5% 1/8W 0805", Device Package="0805 (2012 Metric)", manufacturer="TE Connectivity Passive Product", Operating Temperature="-55°C ~ 155°C", Power (Watts)="0.125W, 1/8W", Ratings=AEC-Q200, Supplier Device Package=0805, Supplier Part Number 1=A130142CT-ND, Temperature Coefficient=±100ppm/°C, Tolerance=±5%, componentlink1description=Datasheet, componentlink1url=https://www.te.com/commerce/DocumentDelivery/DDEController?Action=srchrtrv&DocNm=1773204-3&DocType=DS&DocLang=English, componentlink2description="DigiKey Link", componentlink2url=https://www.digikey.com/en/products/detail/te-connectivity-passive-product/CRGCQ0805J22K/8576744, Composition="Thick Film", Features="Automotive AEC-Q200, Moisture Resistant", Height - Seated (Max)="0.026\" (0.65mm)", lastupdated="02.01.2023 20:44:45", Lifecycle Status=Active, Minimum Order=1, Number of Terminations=2, Package / Case="0805 (2012 Metric)", packaging=TapeAndReel, Part Number=CRGCQ0805J22K, Part Status=Active, partid=29521, price=0.01, Resistance="22 kOhms", series=CRGCQ, Size / Dimension="0.079\" L x 0.049\" W (2.00mm x 1.25mm)", Supplier 1=DigiKey
R9 R25: library part CRGP0805F47R, "RES 47 OHM 1% 1/3W 0805", Device Package="0805 (2012 Metric)", manufacturer="TE Connectivity Passive Product", Operating Temperature="-55°C ~ 155°C", Power (Watts)="0.333W, 1/3W", Supplier Device Package=0805, Supplier Part Number 1=A130461CT-ND, Temperature Coefficient=±200ppm/°C, Tolerance=±1%, componentlink1description=Datasheet, componentlink1url=https://www.te.com/commerce/DocumentDelivery/DDEController?Action=srchrtrv&DocNm=9-1773463-9&DocType=DS&DocLang=English, componentlink2description="DigiKey Link", componentlink2url=https://www.digikey.com/en/products/detail/te-connectivity-passive-product/CRGP0805F47R/8577063, Composition="Thick Film", Features="Pulse Withstanding", Height - Seated (Max)="0.026\" (0.65mm)", lastupdated="02.01.2023 20:44:48", Lifecycle Status=Active, Minimum Order=1, Number of Terminations=2, Package / Case="0805 (2012 Metric)", packaging=TapeAndReel, Part Number=CRGP0805F47R, Part Status=Active, partid=28763, price=0.03, Resistance="47 Ohms", series=CRGP, Size / Dimension="0.079\" L x 0.049\" W (2.00mm x 1.25mm)", Supplier 1=DigiKey
R11 R12 R14: library part TLRH3AWTTER150F, "RES 150M OHM 1% 2W 2512", Device Package="2512 (6432 Metric)", manufacturer="KOA Speer Electronics, Inc.", Operating Temperature="-65°C ~ 170°C", Power (Watts)=2W, Ratings=AEC-Q200, Supplier Device Package=2512, Supplier Part Number 1=2019-TLRH3AWTTER150FCT-ND, Temperature Coefficient=±50ppm/°C, Tolerance=±1%, componentlink1description=Datasheet, componentlink1url=http://www.koaspeer.com/catimages/Products/TLRH/TLRH.pdf, componentlink2description="DigiKey Link", componentlink2url=http://digikey.com/product-detail/en/koa-speer-electronics-inc/TLRH3AWTTER150F/2019-TLRH3AWTTER150FCT-ND/9847534, Composition="Metal Element", Features="Automotive AEC-Q200, Current Sense", Height - Seated (Max)="0.028\" (0.70mm)", lastupdated="02.09.2020 01:27:01", Lifecycle Status=Active, Minimum Order=1, Number of Terminations=2, Package / Case="2512 (6432 Metric)", packaging=TapeAndReel, Part Number=TLRH3AWTTER150F, Part Status=Active, price=0.57, Resistance="150 mOhms", series=TLRH, Size / Dimension="0.248\" L x 0.126\" W (6.30mm x 3.20mm)", Supplier 1=DigiKey
R15 R16 R17 R18: library part RT1206BRB07100KL, "RES SMD 100K OHM 0.1% 1/4W 1206", Device Package="1206 (3216 Metric)", manufacturer=Yageo, Operating Temperature="-55°C ~ 155°C", Power (Watts)="0.25W, 1/4W", Supplier Device Package=1206, Supplier Part Number 1=YAG5016CT-ND, Temperature Coefficient=±10ppm/°C, Tolerance=±0.1%, componentlink1description=Datasheet, componentlink1url=https://www.yageo.com/upload/media/product/productsearch/datasheet/rchip/PYu-RT_1-to-0.01_RoHS_L_11.pdf, componentlink2description="DigiKey Link", componentlink2url=https://www.digikey.com/en/products/detail/yageo/RT1206BRB07100KL/5936250, Composition="Thin Film", Height - Seated (Max)="0.026\" (0.65mm)", lastupdated="02.01.2023 20:37:38", Lifecycle Status=Active, Minimum Order=1, Number of Terminations=2, Package / Case="1206 (3216 Metric)", packaging=TapeAndReel, Part Number=RT1206BRB07100KL, Part Status=Active, partid=26928, price=0.23, Resistance="100 kOhms", series=RT, Size / Dimension="0.122\" L x 0.063\" W (3.10mm x 1.60mm)", Supplier 1=DigiKey
R19: library part CRG1206F4K7, "RES SMD 4.7K OHM 1% 1/4W 1206", Device Package="1206 (3216 Metric)", manufacturer="TE Connectivity Passive Product", Operating Temperature="-55°C ~ 155°C", Power (Watts)="0.25W, 1/4W", Supplier Device Package=1206, Supplier Part Number 1=A106078CT-ND, Temperature Coefficient=±100ppm/°C, Tolerance=±1%, componentlink1description=Datasheet, componentlink1url=https://www.te.com/commerce/DocumentDelivery/DDEController?Action=srchrtrv&DocNm=1773204&DocType=DS&DocLang=English, componentlink2description="DigiKey Link", componentlink2url=https://www.digikey.com/en/products/detail/te-connectivity-passive-product/CRG1206F4K7/2381014, Composition="Thick Film", Height - Seated (Max)="0.026\" (0.65mm)", lastupdated="02.01.2023 20:37:38", Lifecycle Status=Active, Minimum Order=1, Number of Terminations=2, Package / Case="1206 (3216 Metric)", packaging=TapeAndReel, Part Number=CRG1206F4K7, Part Status=Active, partid=26987, price=0.01, Resistance="4.7 kOhms", series="CRG, Neohm", Size / Dimension="0.122\" L x 0.061\" W (3.10mm x 1.55mm)", Supplier 1=DigiKey
R26: library part RNCS0805BKE10K0, "RES 10K OHM 0.1% 1/10W 0805", Device Package="0805 (2012 Metric)", manufacturer="Stackpole Electronics Inc", Operating Temperature="-55°C ~ 155°C", Power (Watts)="0.1W, 1/10W", Ratings=AEC-Q200, Supplier Device Package=0805, Supplier Part Number 1=RNCS0805BKE10K0CT-ND, Temperature Coefficient=±25ppm/°C, Tolerance=±0.1%, componentlink1description=Datasheet, componentlink1url=https://www.seielect.com/catalog/sei-rncs_rnch.pdf, componentlink2description="DigiKey Link", componentlink2url=https://www.digikey.com/en/products/detail/stackpole-electronics-inc/RNCS0805BKE10K0/1800067, Composition="Thin Film", Features="Anti-Corrosive, Automotive AEC-Q200, Moisture Resistant", Height - Seated (Max)="0.026\" (0.65mm)", lastupdated="02.01.2023 20:44:52", Lifecycle Status=Active, Minimum Order=1, Number of Terminations=2, Package / Case="0805 (2012 Metric)", packaging=TapeAndReel, Part Number=RNCS0805BKE10K0, Part Status=Active, partid=27713, price=0.09, Resistance="10 kOhms", series=RNCS, Size / Dimension="0.079\" L x 0.049\" W (2.00mm x 1.25mm)", Supplier 1=DigiKey
R27: library part ROX1SJ330K, "Resistor", Manufacturer_Name="TE Connectivity", Mouser Part Number=279-ROX1SJ330K, Datasheet Link=http://www.te.com/commerce/DocumentDelivery/DDEController?Action=showdoc&DocId=Data+Sheet%7F1773271%7FE%7Fpdf%7FEnglish%7FENG_DS_1773271_E.pdf%7F1625886-2, Manufacturer_Part_Number=ROX1SJ330K, Mouser Price/Stock=http://www.mouser.com/Search/ProductDetail.aspx?qs=ip69W3eHERVe%2fUOZ1paVUg%3d%3d
R28: "https://www.tme.eu/pl/details/ax10wv-47r/rezystory-mocy/royal-ohm/prmaawjw470b00/"
RL1: "https://www.tme.eu/pl/details/g2r-1a-e-24dc/przekazniki-elektromagn-miniaturowe/omron-ocb/g2r-1a-e-24vdc/"
RV1: library part B72220Q0271K101, "B72220S0271K101", Manufacturer_Name=TDK, Mouser Part Number=871-B72220Q271K101, Arrow Part Number=B72220Q0271K101, Arrow Price/Stock=https://www.arrow.com/en/products/b72220q0271k101/epcos-tdk, Datasheet Link=https://product.tdk.com/system/files/dam/doc/product/protection/voltage/lead-disk-varistor/data_sheet/70/db/var/siov_leaded_energetiq.pdf, Height=27mm, Manufacturer_Part_Number=B72220Q0271K101, Mouser Price/Stock=https://www.mouser.co.uk/ProductDetail/EPCOS-TDK/B72220Q0271K101?qs=dEfas%2FXlABKTVg%252B2uP1HuA%3D%3D
TP1 TP2 TP3 TP4 TP5 TP8 TP9 TP10 TP11 TP12 TP13 TP14 TP15 TP16 TP17 TP18 TP19 TP20: library part Testpoint
U2: "No Description Available", Mfr_Name="Traco Power", Copyright="Copyright (C) 2022 Ultra Librarian. All rights reserved.", Digi-Key_Part_Number_1=1951-3431-ND, Manufacturer_Part_Number="TBA 2-0513", RefDes=RefDes, Type=DEV
U14: "No Description Available", Mfr_Name=Microchip, Copyright="Copyright (C) 2022 Ultra Librarian. All rights reserved.", Manufacturer_Part_Number=MCP3002-I/SN, RefDes=RefDes, Type=DEV

## Free pads (board coordinates)
  round 2 hole 1.2: 1(23.5,157.2) 1(23.9,9.5)
  rect 7x0.5 smd: 1(72.7,93.65) 1(77,51.05) 2(72.7,99.95) 2(77,44.75)

## Via types
v1: diameter 0.6, hole 0.3, Top Layer to Bottom Layer, 78 vias
v2: diameter 1, hole 0.6, Top Layer to Bottom Layer, 17 vias

## Nets (pads, with @x,y where several pads share a name; then routed paths per layer and width w, separated by ;. In a path a pad name is that pad's centre, name@x,y a point inside that pad or via, vN(x,y) a via of type N, cw(c..) or ccw(c..) an arc to the next point about the centre after c; other vN are vias at no path point)
+3V3: C1.2 C23.2 C26.2 J5.19 pad.1@77,51.05 U1.6 U9.6 | length 222.6
  Top Layer w0.15: 73.45,49 74.5,49 cw(c77,47.9) 77,50.631 cw(c77,47.9) 79.5,49 80.55,49
  Top Layer w0.6: v1(15.2,108.6) 16.6,108.6 C1.2@16.7,108.5 ; U1.6@16.5,105.85 16.5,106.2 16.7,106.4 C1.2@16.7,108.5 ; J5.19@35.05,123.25 35.05,124.799 34.699,125.15 26.25,125.15 16.7,115.6 C1.2@16.7,108.5 ; v1(35.8,129.3) 38.8,129.3 41.8,126.3 48.7,126.3 51.3,128.9 53.9,128.9 57.2,125.6 64.5,125.6 70.9,119.2 v1(78.6,119.2) ; U9.6@59.7,105.75 59.75,105.8 59.75,109.25 C23.2@59.8,109.3 59.9,109.4 v1(59.9,111.1) ; pad.1@77,51.05 77,52.85 78.1,53.95 78.1,55.5 80.4,57.8 80.4,114.249 79.974,114.674 79.426,114.674 v1(79,115.1)
  Bottom Layer w0.6: v1(15.2,108.6) 16.4,109.8 22.1,109.8 22.8,109.1 59.449,109.1 59.8,109.451 59.8,111 v1(59.9,111.1) ; J5.19@35.05,123.25 35.05,128.55 v1(35.8,129.3) ; v1(78.6,119.2) 79.027,118.773 79.027,116.064 79,116.037 v1(79,115.1)
+5: C2.2 J5.2 TP1.1 U2.1 | length 40.4
  Top Layer w0.6: U2.1@5.75,108.585 9.185,108.585 9.3,108.7 9.3,117.225 v1(9.9,117.825) ; v1(30.375,117.85) 34,117.85 35.05,118.9 J5.2@35.05,120.71
  Bottom Layer w0.6: v1(9.9,117.825) 10.1,117.825 10.125,117.85 v1(30.375,117.85)
+5_HOT: C3.2 C4.2 C5.2 C6.2 C7.2 C8.2 C25.2 C30.2 C34.2 C36.2 IC1.2 IC1.4 pad.2@72.7,99.95 TP11.1 U1.1 U3.6 U4.6 U5.6 U6.6 U7.6 U8.6 U11.6 U13.6 U15.6 | length 137.6
  Top Layer w0.15: 69.15,97.9 70.2,97.9 cw(c72.7,96.8) 72.7,99.531 cw(c72.7,96.8) 75.2,97.9 76.25,97.9
  Top Layer w0.5: U7.6@23.8,99.25 23.8,98.3 24.25,97.85 C8.2@24.25,96 ; U6.6@28.535,99.15 28.593,99.093 C7.2@28.593,96.057 ; U5.6@33.363,99.15 33.381,99.131 C6.2@33.381,96.019 ; C5.2@38,96 38.095,96.095 38.095,99.055 U4.6@38.19,99.15 ; C4.2@42.9,96 42.959,96.059 42.959,99.091 U8.6@43.017,99.15 ; C3.2@47.65,96 47.747,96.097 47.747,99.053 U3.6@47.844,99.15
  Top Layer w0.6: IC1.4@12.3,96.45 13,97.15 14.75,97.15 16.5,98.9 U1.1@16.5,99.25 ; C8.2@24.25,96 24.301,95.949 24.301,94.778 24.778,94.3 v1(24.925,94.3) ; v1(28.5,94.2) C7.2@28.5,95.9 ; v1(33.35,94.275) 33.35,95.987 C6.2@33.381,96.019 ; v1(37.95,94.2) 37.95,95.95 C5.2@38,96 ; C4.2@42.9,96 42.925,95.975 v1(42.925,94.2) ; v1(47.625,94.125) 47.625,95.975 C3.2@47.65,96 ; U13.6@52.6,99.078 C34.2@52.6,96 52.625,95.975 v1(52.625,94.2) ; v1(57.5,94.175) C36.2@57.5,96 U15.6@57.5,99.15 ; v1(67.3,94.2) 67.3,98.4 66.9,98.8 U11.6@67,98.9 68.325,98.9 69.025,99.6 70.7,99.6 71.05,99.95 pad.2@72.7,99.95
  Top Layer w1: 12.3,93.7 13.1,92.9 15.6,92.9 17.2,91.3 17.2,90.7 C25.2@19.8,88.1
  Top Layer w1.5: IC1.2@12.3,90.15 12.3,93.7 IC1.4@12.3,96.45
  Bottom Layer w1.5: v2@12.364,96.5 15.4,96.5 17.673,94.227 67.273,94.227 v1(67.3,94.2)
  other v2: 12.364,96.514